# Allegro board Wireless Ember with FEM V1.0.brd
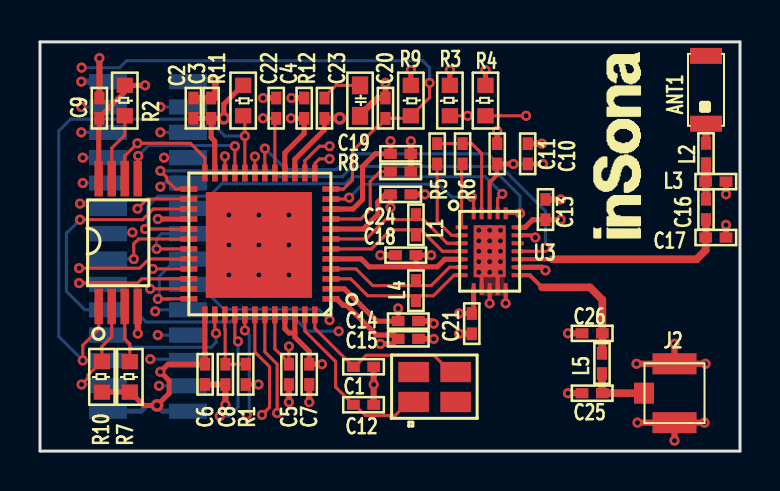
[diagram p0: board, top side]
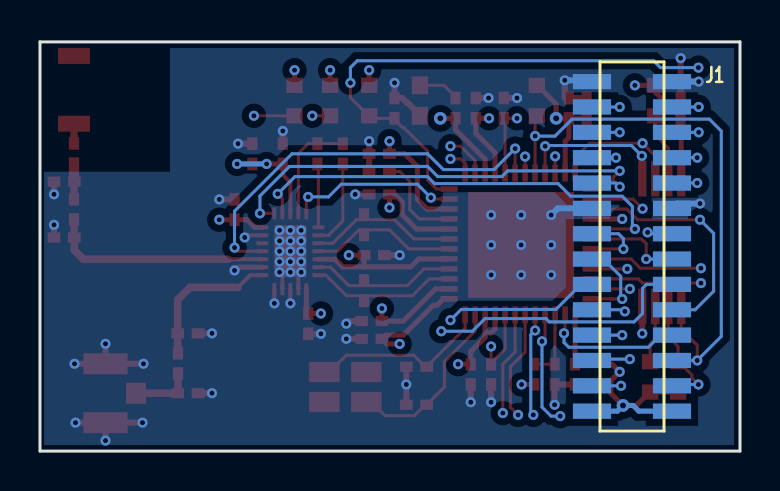
[diagram p1: board, bottom side, seen from below]

Outline 35 x 20.5 mm; copper layers: TOP, GND, PWR, BOTTOM. Coordinates in mm from the lower left corner of the outline.
Outline path: 0,20.5 0,0 35,0 35,20.5 0,20.5

## Design rules (mm)
nets with their own width: min track width 0.254; nets +1.8V +3.3V
nets with their own width: min track width 0.305; nets GND

## Placement (name value [footprint] x y rotation side)
ANT1  2450AT18B100  [AT18B100]  33.3 16.4 90 top
C1  18pF-SC0402  [SC0402]  15.67 4.23 0 top
C2  100nF-SC0402  [SC0402]  7.67 16.67 90 top
C3  0.1uF-SC0402  [SC0402]  8.56 16.67 90 top
C4  0.1uF-SC0402  [SC0402]  13.21 16.67 90 top
C5  10nF-SC0402  [SC0402]  12.45 4.35 270 top
C6  0.1uF-SC0402  [SC0402]  8.26 4.35 270 top
C7  8pF-SC0402  [SC0402]  13.46 4.35 270 top
C8  0.47uF-SC0402  [SC0402]  9.27 4.35 270 top
C9  100nF-SC0402  [SC0402]  2.97 16.67 90 top
C10  100nF-SC0402  [SC0402]  24.38 14.39 90 top
C11  10pF-SC0402  [SC0402]  22.86 14.39 90 top
C12  18pF-SC0402  [SC0402]  15.67 2.32 0 top
C13  10pF-SC0402  [SC0402]  25.27 11.59 90 top
C14  10nF-SC0402  [SC0402]  18.92 6.51 180 top
C15  10nF-SC0402  [SC0402]  18.92 5.62 180 top
C16  NC  [SC0402]  33.3 11.6 90 top
C17  NC  [SC0402]  34.3 10.7 180 top
C18  8pF-SC0402  [SC0402]  17.78 9.81 0 top
C19  10nF-SC0402  [SC0402]  18.54 14.89 180 top
C20  10nF-SC0402  [SC0402]  17.27 17.69 270 top
C21  8pF-SC0402  [SC0402]  21.59 5.88 90 top
C22  1uF-SC0402  [SC0402]  11.81 16.67 90 top
C23  2.2uF-SC0603  [SC0603]  16 17.56 270 top
C24  10nF-SC0402  [SC0402]  18.54 12.86 180 top
C25  1pF-SC0402  [SC0402]  27.1 2.9 0 top
C26  1pF-SC0402  [SC0402]  27.1 5.9 0 top
J1  J14x2  [CON2X14_127]  3.4 2 90 bottom
J2  108-112005  [UMCC-3]  30.2 2.9 270 top
L1  3.3nH-SL0402  [L0402]  18.8 10.83 90 top
L2  2.0nH-SL0402  [L0402]  33.3 14.4 90 top
L3  1.5nH-SL0402  [L0402]  34.3 13.5 180 top
L4  3.0nH-SL0402  [L0402]  18.8 7.53 90 top
L5  2.7nH-SL0402  [L0402]  28.1 4.9 270 top
R1  10R-SR0402  [SR0402]  10.29 3.34 90 top
R2  4K7-SR0603  [SR0603]  4.24 17.56 90 top
R3  4K7-SR0603  [SR0603]  20.5 17.56 90 top
R4  4K7-SR0603  [SR0603]  22.27 17.56 90 top
R5  1K2-SR0402  [SR0402]  19.86 14.39 90 top
R6  1K2-SR0402  [SR0402]  21.13 14.39 90 top
R7  4K7-SR0603  [SR0603]  4.49 3.72 90 top
R8  180K-SR0402  [SR0402]  18.54 14.01 180 top
R9  4K7-SR0603  [SR0603]  18.54 17.56 270 top
R10  4K7-SR0603  [SR0603]  3.1 3.72 90 top
R11  4K7-SR0603  [SR0603]  10.16 17.56 270 top
R12  1R-SR0402  [SR0402]  14.22 17.69 270 top
U1  CAT25512  [TSSOP8-26-173]  3.91 10.45 90 top
U2  ST32W108CC  [QFN48-20-284]  14.49 13.88 180 top
U3  -  [SE2432L]  21.08 11.21 270 top
Y1  xtal-24M  [XTAL-128-100]  19.73 3.21 90 top

## Library data of the parts
ANT1 = ANTENNA_1
C1-C26 = CAP NP
J1 = J14*2
J2 = 108-112005
L1-L5 = INDUCTOR
R1-R12 = R
U1 = CAT25512
U2 = ST32W108CC_1
U3 = SE2432L
Y1 = xtal-32M

## Footprints (pads in the part's own frame, mm; a bottom-side part is the same pattern mirrored in y, then rotated)
AT18B100
  rect 0.8x1.6 smd: 1(0,0) 2(3.4,0)
CON2X14_127
  rect 0.762x1.905 smd: 1(0,0) 2(0,4) 3(1.27,0) 4(1.27,4) 5(2.54,0) 6(2.54,4) 7(3.81,0) 8(3.81,4) 9(5.08,0) 10(5.08,4) 11(6.35,0) 12(6.35,4) 13(7.62,0) 14(7.62,4) 15(8.89,0) 16(8.89,4) 17(10.16,0) 18(10.16,4) 19(11.43,0) 20(11.43,4) 21(12.7,0) 22(12.7,4) 23(13.97,0) 24(13.97,4) 25(15.24,0) 26(15.24,4) 27(16.51,0) 28(16.51,4)
L0402
  rect 0.635x0.508 smd: 1(0,0) 2(1.016,0)
QFN48-20-284
  rect 0.85x0.28 smd: 1(-0.05,6.25) 2(-0.05,5.75) 3(-0.05,5.25) 4(-0.05,4.75) 5(-0.05,4.25) 6(-0.05,3.75) 7(-0.05,3.25) 8(-0.05,2.75) 9(-0.05,2.25) 10(-0.05,1.75) 11(-0.05,1.25) 12(-0.05,0.75) 25(7.05,0.75) 26(7.05,1.25) 27(7.05,1.75) 28(7.05,2.25) 29(7.05,2.75) 30(7.05,3.25) 31(7.05,3.75) 32(7.05,4.25) 33(7.05,4.75) 34(7.05,5.25) 35(7.05,5.75) 36(7.05,6.25)
  rect 0.28x0.85 smd: 13(0.75,-0.05) 14(1.25,-0.05) 15(1.75,-0.05) 16(2.25,-0.05) 17(2.75,-0.05) 18(3.25,-0.05) 19(3.75,-0.05) 20(4.25,-0.05) 21(4.75,-0.05) 22(5.25,-0.05) 23(5.75,-0.05) 24(6.25,-0.05) 37(6.25,7.05) 38(5.75,7.05) 39(5.25,7.05) 40(4.75,7.05) 41(4.25,7.05) 42(3.75,7.05) 43(3.25,7.05) 44(2.75,7.05) 45(2.25,7.05) 46(1.75,7.05) 47(1.25,7.05) 48(0.75,7.05)
  rect 5.3x5.3 smd: 49(3.55,3.55)
SC0402
  rect 0.635x0.508 smd: 1(0,0) 2(1.016,0)
SC0603
  rect 0.889x0.813 smd: 1(-0.762,0) 2(0.762,0)
SE2432L
  rect 0.2x0.6 smd: 1(0,0) 2(0.4,0) 3(0.8,0) 4(1.2,0) 5(1.6,0) 6(2,0) 7(2.4,0) 13(2.4,2.8) 14(2,2.8) 15(1.6,2.8) 16(1.2,2.8) 17(0.8,2.8) 18(0.4,2.8) 19(0,2.8)
  rect 0.6x0.2 smd: 8(3.1,0.6) 9(3.1,1) 10(3.1,1.4) 11(3.1,1.8) 12(3.1,2.2) 20(-0.7,2.2) 21(-0.7,1.8) 22(-0.7,1.4) 23(-0.7,1) 24(-0.7,0.6)
  rect 2.6x1.6 smd: 25(1.2,1.4)
SR0402
  rect 0.635x0.508 smd: 1(0,0) 2(1.016,0)
SR0603
  rect 0.762x0.813 smd: 1(-0.762,0) 2(0.762,0)
TSSOP8-26-173
  rect 1.78x0.42 smd: 1(-3.2,0.975) 2(-3.2,0.325) 3(-3.2,-0.325) 4(-3.2,-0.975) 5(3.2,-0.975) 6(3.2,-0.325) 7(3.2,0.325) 8(3.2,0.975)
UMCC-3
  rect 1.05x1 smd: 1(0,0)
  rect 1.05x2.2 smd: 2(-1.475,1.525) 3(1.475,1.525)
XTAL-128-100
  rect 1.016x1.524 smd: 1(-0.75,1.05) 2(-0.75,-1.05) 3(0.75,-1.05) 4(0.75,1.05)

## Nets
+1.2V: C5.1 C22.1 U2.17(VDD_CORE1) U2.44(VDD_CORE2)
+1.8V: C7.1 C14.2 C15.2 C18.2 C19.2 C21.2 C24.2 R1.1 R12.2 U2.1(VDD_24M) U2.2(VDD_VCO) U2.5(VDD_RF) U2.8(VDD_IF) U2.10(VDD_PADSA) U2.15(VREG_OUT) U2.45(VDD_PRE) U2.46(VDD_SYNTH) U3.5(VB_OUT) U3.8(VB_IN)
+3.3V: C2.1 C3.1 C4.1 C6.1 C9.1 C10.1 C11.1 C13.1 J1.1 J1.2 R2.2 R3.2 R4.2 R7.1 R9.1 R10.1 R11.1 U1.8(VCC) U2.16(VDD_PADS1) U2.23(VDD_PADS2) U2.28(VDD_PADS3) U2.37(VDD_PADS4) U3.19(VCC2) U3.22(VCC1)
GND: C1.2 C2.2 C3.2 C4.2 C5.2 C6.2 C7.2 C8.2 C9.2 C10.2 C11.2 C12.2 C13.2 C14.1 C15.1 C17.1 C18.1 C19.1 C20.1 C21.1 C22.2 C23.2 C24.1 C25.1 C26.1 J1.17 J1.18 J1.27 J1.28 J2.2(G1) J2.3(G2) L3.1 R8.1 U1.4(VSS) U2.49(EPAD) U3.9(GND1) U3.10(GND2) U3.11(GND3) U3.12(GND4) U3.14(GND5) U3.18(GND6) U3.25(PAD)
VDD_MEM: C8.1 R1.2 U2.39(VDD_MEM)
ANT1: C16.1 C17.2 U3.15(ANT1)
ANT2: C26.2 L5.1 U3.13(ANT2)
BOUT: R5.2 R6.2 U3.23(BOUT)
CLK: J1.4 U1.6(SCK) U2.24(PA2)
JTCK: J1.19 U2.32(JTCK)
JTMS: J1.22 U2.35(PC4/JTMS)
MISO: J1.3 R10.2 U1.2(SO) U2.22(PA1)
MOSI: J1.6 U1.5(SI) U2.21(PA0)
NRST: C20.2 J1.15 R9.2 U2.12(NRST)
PA3: R4.1 U2.25(PA3) U3.20(CSD)
PA4: J1.10 U2.26(PA4)
PA5: J1.9 U2.27(PA5)
PA6: R3.1 U2.29(PA6) U3.21(CPS)
PA7: U2.18(PA7/REG_EN) U3.16(ANT_SEL)
PB0: J1.14 U2.36(PB0)
PB3: J1.8 U2.19(PB3)
PB4: J1.5 R11.2 U1.1(/CS) U2.20(PB4)
PB5: J1.26 U2.43(PB5)
PB6: J1.25 U2.42(PB6)
PB7: J1.24 U2.41(PB7)
PC0: J1.23 U2.40(PC0)
PC1: J1.7 U2.38(PC1)
PC2: J1.20 U2.33(PC2/JTDO)
PC3: J1.21 U2.34(PC3/JTDI)
PC5: U2.11(PC5) U3.24(CTX)
PC6: J1.12 U2.13(PC6)
PC7: J1.11 U2.14(PC7)
RF_N: L4.2 U2.4(RF_N) U3.6(RXP)
RF_P: L4.1 U2.3(RF_P) U3.7(RXN)
RF_TX_ALT_N: L1.2 U2.7(RF_TX_ALT_N) U3.3(TXP)
RF_TX_ALT_P: L1.1 U2.6(RF_TC_ALT_P) U3.4(TXN)
RXD: J1.16 U2.31(PB2)
TXD: J1.13 U2.30(PB1)
X1: C12.1 U2.47(OSC_IN) Y1.1
X2: C1.1 U2.48(OSC_OUT) Y1.3
N463813: R2.1 U1.7(/HOLD)
N464721: C23.1 R12.1
N465331: R8.2 U2.9(BIAS_R)
N472504: R6.1 U3.1(B2)
N472511: R5.1 U3.2(B1)
N474104: C16.2 L2.1 L3.2
N474119: ANT1.1(FEED) L2.2
N474333: C25.2 J2.1(SIG) L5.2
N485407: R7.2 U1.3(/WP)

Pads without a net: ANT1 2; U3 17; Y1 2 4

## Via types
v1: diameter 0.508, hole 0.254, TOP to BOTTOM, 117 vias
v2: diameter 0.635, hole 0.305, TOP to BOTTOM, 3 vias
v3: diameter 0.5, hole 0.25, TOP to BOTTOM, 15 vias

## Routing (per net, layer and track width the routed paths; a pad name or vN(x,y) marks a point on that pad's centre or on a via; arc(x,y) is an arc through that point)
+1.2V: length 28.6
  TOP w0.152: v1(11.15,16.67) C22.1 11.74,16.61 U2.17 ; 12.45,4.42 v1(12.45,5.24) ; 12.45,4.42 C5.1 ; 12.45,4.42 11.74,5.12 U2.44
  PWR w0.254: v1(12.45,5.24) 12.45,3.59 11.68,2.83 8.76,2.83 8.05,3.54 8.05,14.51 10.21,16.67 v1(11.15,16.67)
+1.8V: length 135.3
  TOP w0.254: 18.8,9.23 16.46,9.23 16.06,9.63 U2.5 ; 18.8,9.23 C18.2 v1(19.56,9.81) ; 18.8,9.23 19.86,9.23 20.24,9.61 U3.5 ; U2.45 12.24,6.12 12.45,5.92 12.74,5.92 ; U2.15 12.74,14.62 14.22,16.1 R12.2 v2(14.99,16.67) ; v1(17.53,12.2) C24.2 17.27,12.86 16.89,12.48 16.89,11.85 16.17,11.13 U2.8 ; 12.74,5.92 12.74,5.71 13.46,4.99 C7.1 v1(14.1,4.35) ; 12.74,5.92 U2.46 ; R1.1 v1(10.92,3.34) ; U2.10 15.65,12.13 16.13,12.61 16.13,14.26 16.76,14.89 C19.2 v1(17.53,15.53) ; U2.1 14.83,7.63 15.15,7.31 15.33,7.31 16.83,5.81 17.72,5.81 17.91,5.62 17.65,5.37 v1(17.02,5.37) ; v1(17.91,7.15) 17.91,6.51 16.84,6.51 15.22,8.13 U2.2 ; U3.8 21.68,6.99 C21.2 v1(20.95,6.89)
  PWR w0.254: v1(10.92,3.34) 10.03,3.34 9.31,4.06 9.31,6.59 8.64,7.26 8.64,12.81 9.32,13.5 11.35,13.5 12.24,14.39 12.24,15.44 13.47,16.67 v2(14.99,16.67) ; v1(17.53,12.2) 17.89,11.84 18.54,11.19 18.54,7.78 19.43,6.89 v1(20.95,6.89) 20.95,16.34 19.35,17.94 15.37,17.94 14.99,17.56 v2(14.99,16.67) ; v2(14.99,16.67) 16.38,16.67 v1(17.53,15.53) ; v2(14.99,16.67) 16.64,15.02 16.64,11.97 17.91,10.7 v1(17.91,7.15) ; v2(14.99,16.67) 13.59,15.28 13.59,6.13 14.1,5.62 v1(14.1,4.35) ; v2(14.99,16.67) 15.49,17.18 19.05,17.18 19.94,16.29 19.94,11.72 19.56,11.34 v1(19.56,9.81) ; v2(14.99,16.67) 14.99,15.58 16.13,14.43 16.13,6.26 v1(17.02,5.37)
+3.3V: length 94.2
  TOP w0.2: C11.1 22.86,13.84 22.48,13.46 U3.22
  TOP w0.254: U1.8 2.94,16.07 2.97,16.1 C9.1 2.97,16.72 4.21,17.97 4.21,18.3 R2.2 v1(5.25,18.32) ; v1(26.04,11.59) C13.1 24.64,11.59 24.26,11.21 U3.19 ; U2.28 v1(5.89,11.63) ; R3.2 v1(20.5,19.09) ; U2.37 8.24,4.94 8.26,4.92 C6.1 6.4,4.35 v1(6.02,3.97) 6.46,3.53 6.46,2.89 v2(5.85,2.29) 5.19,2.29 4.52,2.96 R7.1 R10.1 ; R9.1 v1(18.54,19.09) ; C10.1 v1(25.15,14.39) ; R4.2 v1(22.27,19.09) ; C3.1 8.56,15.71 8.74,15.53 8.74,13.94 U2.23 ; C3.1 v2(9.19,16.67) 9.19,17.38 10.13,18.32 R11.1 ; C3.1 C2.1 ; C11.1 v1(23.67,14.39) ; v1(12.55,16.67) C4.1 13.21,15.91 12.24,14.95 U2.16
  PWR w0.254: v1(5.25,18.32) 7.54,18.32 v2(9.19,16.67) ; v2(9.19,16.67) 7.79,16.67 6.53,15.4 5.89,15.4 5.42,14.93 5.42,12.61 5.89,12.14 v1(5.89,11.63) ; v2(9.19,16.67) 9.7,17.18 12.04,17.18 v1(12.55,16.67) 14.96,19.09 v1(18.54,19.09) v1(20.5,19.09) v1(22.27,19.09) 23.67,17.69 v1(23.67,14.39) ; v1(25.15,14.39) 25.15,12.48 v1(26.04,11.59)
  PWR w0.381: v2(9.19,16.67) 7.29,14.77 7.29,3.15 6.83,2.69 6.25,2.69 v2(5.85,2.29)
  BOTTOM w0.254: v1(23.67,14.39) v1(25.15,14.39) ; J1.2 6.14,2 v2(5.85,2.29) 5.34,2.29 5.06,2 J1.1
GND: length 47.8
  TOP w0.2: U3.11 22.88,9.61 v3(22.48,10.01) 22.08,9.61 U3.9 ; U3.10 v1(22.48,7.4) ; v1(24.77,10.7) 24.66,10.81 U3.18 ; U3.12 v1(23.28,7.4)
  TOP w0.254: U3.14 25.11,9.21 v1(25.27,9.05)
  TOP w0.305: C6.2 C8.2 v1(9.27,2.32) ; R8.1 C19.1 v1(18.54,15.53) ; C2.2 C3.2 8.76,17.69 v1(8.76,18.58) ; v1(17.27,18.45) C20.1 16.89,17.69 16.64,17.44 16.61,17.44 16,16.84 C23.2 ; C22.2 v1(11.15,17.69) ; C15.1 v1(19.68,5.62) ; J2.3 v1(29.88,1.43) ; J2.3 v1(31.73,0.53) ; J2.3 v1(33.23,1.43) ; J2.2 v1(31.73,5.38) ; J2.2 v1(29.82,4.38) ; J2.2 v1(33.27,4.38) ; C13.2 v1(26.04,12.61) ; C26.1 v1(26.4,5.9) ; C14.1 19.56,6.51 v1(19.68,6.38) ; U1.4 v1(4.89,5.89) ; C5.2 v1(12.45,2.45) ; C9.2 v1(2.97,19.68) ; 16.68,4.23 v1(16.68,3.34) 16.68,2.32 ; C24.1 v1(19.24,12.86) ; C7.2 v1(13.46,2.45) ; C21.1 v1(20.95,5.88) ; C11.2 v1(22.86,16.04) ; C10.2 v1(25.1,15.4) ; C17.1 v1(34.3,11.34) ; L3.1 v1(34.3,12.87) ; C25.1 v1(26.4,2.9) ; C4.2 v1(12.57,17.69) ; C18.1 v1(17.02,9.81)
  BOTTOM w0.305: v1(9.44,11.83) 9.11,12.16 J1.18 ; v1(8.76,18.58) 7.47,18.58 J1.28 ; J1.27 v1(2.07,18.51) ; J1.17 3.16,12.4 v1(2,12.4)
  vias: v1(9.44,10.33) v1(9.44,8.83) v1(10.94,11.83) v1(10.94,10.33) v1(10.94,8.83) v1(12.44,11.83) v1(12.44,10.33) v1(12.44,8.83) v3(21.94,11.06) v3(21.94,10.53) v3(21.94,10.01) v3(21.94,9.49) v3(21.94,8.96) v3(22.48,11.06) v3(22.48,10.53) v3(22.48,9.49) v3(22.48,8.96) v3(23.02,11.06) v3(23.02,10.53) v3(23.02,10.01) v3(23.02,9.49) v3(23.02,8.96)
VDD_MEM: length 3.5
  TOP w0.152: R1.2 C8.1 9.26,4.37 9.26,6.09 9.24,6.1 U2.39
ANT1: length 11.1
  TOP w0.203: U3.15 25.6,9.61
  TOP w0.381: 25.6,9.61 32.83,9.61 33.28,10.06 C17.2 33.3,10.72 C16.1
ANT2: length 7.4
  TOP w0.203: 25.1,8.2 24.49,8.81 U3.13
  TOP w0.381: L5.1 28.12,4.92 C26.2 28.12,7.58 27.5,8.2 25.1,8.2
BOUT: length 5.4
  TOP w0.152: R5.2 R6.2 21.59,15.4 22.08,14.91 22.08,12.48 U3.23
CLK: length 23.2
  TOP w0.152: U1.6 4.24,14.79 v1(4.87,15.42) 7.52,15.42 8.24,14.7 U2.24
  PWR w0.152: v1(5.95,3.27) 4.18,3.27 3.48,3.97 3.48,14.77 4.13,15.42 v1(4.87,15.42)
  BOTTOM w0.152: J1.4 v1(5.95,3.27)
JTCK: length 11.8
  TOP w0.152: U2.32 5.45,9.63 4.98,9.16 v1(1.95,9.16)
  PWR w0.152: v1(2.14,13.43) 2.71,12.86 2.71,9.92 v1(1.95,9.16)
  BOTTOM w0.152: J1.19 v1(2.14,13.43)
JTMS: length 10.8
  TOP w0.152: U2.35 v1(5.51,8.13)
  PWR w0.152: v1(5.51,8.13) 6.11,8.13 6.78,8.8 6.78,14.12 v1(6.2,14.7)
  BOTTOM w0.152: J1.22 v1(6.2,14.7)
MISO: length 23
  TOP w0.152: U2.22 v1(9.24,14.77) ; U1.2 3.59,5.73 3.1,5.24 R10.2 3.07,4.48 2.4,3.81 2.4,3.66 v1(2.08,3.34)
  GND w0.152: v1(9.24,14.77) 7.79,14.77 6.78,13.75 6.78,7.27 5.89,6.38 4.24,6.38 3.6,5.75 3.6,4.86 v1(2.08,3.34)
  BOTTOM w0.152: J1.3 3.33,3.34 v1(2.08,3.34)
MOSI: length 21.9
  TOP w0.152: U2.21 v1(9.74,15.28) ; U1.5 4.89,14.64 4.91,14.66 v1(4.91,14.79)
  PWR w0.152: v1(5.51,4.61) 4.37,4.61 3.86,5.12 3.86,14.51 4.13,14.79 v1(4.91,14.79)
  BOTTOM w0.152: v1(9.74,15.28) 9.71,15.31 5.43,15.31 v1(4.91,14.79) ; v1(5.51,4.61) 7.33,4.61 J1.6
NRST: length 39.8
  TOP w0.152: U2.12 15.17,13.13 15.62,13.58 15.62,15.02 16.81,16.21 16.87,16.21 17.27,16.61 C20.2 18.41,16.67 R9.2 18.57,16.8 19.48,17.71 v1(19.48,18.45)
  GND w0.152: v1(2.08,19.21) 1.19,18.32 1.19,11.72 1.95,10.96 v1(4.62,10.96)
  BOTTOM w0.152: J1.15 4.55,10.89 v1(4.62,10.96) ; v1(2.08,19.21) 3.98,19.21 4.33,19.56 19.13,19.56 19.48,19.21 v1(19.48,18.45)
PA3: length 29.5
  TOP w0.152: v1(6.02,14.04) 6.34,13.72 6.34,13.57 6.78,13.13 U2.25 ; U3.20 v1(24,11.91) ; R4.1 v1(24.3,16.8)
  PWR w0.152: v1(24,11.91) 24,12.37 24.3,12.67 v1(24.3,16.8)
  BOTTOM w0.152: v1(6.02,14.04) 11.62,14.04 11.91,13.75 15.11,13.75 15.62,14.26 22.53,14.26 24,12.78 v1(24,11.91)
PA4: length 11.2
  TOP w0.152: v1(4.87,12.14) 5.36,12.63 U2.26
  PWR w0.152: v1(5.76,7) 4.64,7 4.16,7.48 4.16,11.43 v1(4.87,12.14)
  BOTTOM w0.152: v1(5.76,7) 5.76,7 5.84,7.08 J1.10
PA5: length 12
  TOP w0.152: U2.27 5.66,12.13 5.13,11.59 v1(2,11.59)
  BOTTOM w0.152: J1.9 2.24,7.08 1.32,8.01 1.32,10.91 v1(2,11.59)
PA6: length 28.7
  TOP w0.152: U3.21 22.88,12.66 v1(23.11,12.89) ; v1(5.25,11.13) U2.29 ; R3.1 v1(21.38,16.8)
  PWR w0.152: v1(23.11,12.89) 22.02,13.98 22.02,16.16 v1(21.38,16.8)
  BOTTOM w0.152: v1(5.25,11.13) 5.38,11.26 5.38,12.26 5.89,12.77 8.46,12.77 9.1,13.4 15.27,13.4 15.62,13.75 22.25,13.75 v1(23.11,12.89)
PA7: length 20.5
  TOP w0.152: U3.16 25.09,10.01 v1(25.27,10.2) ; U2.18 v1(11.24,15.16)
  BOTTOM w0.152: v1(11.24,15.16) 12.3,14.1 14.83,14.1 15.62,14.89 22.4,14.89 25.27,12.02 v1(25.27,10.2)
PB0: length 4.5
  TOP w0.152: v1(5.89,7.62) 6.35,7.62 6.35,7.62 6.48,7.62 6.48,7.63 U2.36
  BOTTOM w0.152: J1.14 6.83,9.62 5.97,8.76 5.97,7.7 v1(5.89,7.62)
PB3: length 14.7
  TOP w0.152: U2.19 v1(10.74,14.76)
  GND w0.152: v1(10.74,14.76) 10.25,14.26 7.79,14.26 7.16,13.62 7.16,7.08 v1(5.89,5.81)
  BOTTOM w0.152: J1.8 v1(5.89,5.81)
PB4: length 29.1
  TOP w0.152: v1(2.14,4.54) 2.14,5.3 2.94,6.1 U1.1 ; U2.20 v1(10.24,15.78) 10.24,16.71 R11.2
  BOTTOM w0.152: J1.5 v1(2.14,4.54) 0.94,5.74 0.94,16.04 1.53,16.63 8.4,16.63 9.24,15.78 v1(10.24,15.78)
PB5: length 39.5
  TOP w0.152: v1(11.86,1.91) 11.86,4.35 11.24,4.97 U2.43
  PWR w0.152: v1(11.86,1.91) 11.86,1.44 11.06,0.64 2.5,0.64 0.56,2.58 0.56,16.42 1.84,17.7 3.98,17.7 4.43,17.24 v1(6.02,17.24)
  BOTTOM w0.152: J1.26 v1(6.02,17.24)
PB6: length 33.1
  TOP w0.152: v1(11.1,1.81) 11.48,2.19 11.48,4.23 10.74,4.96 U2.42
  PWR w0.152: v1(2.07,17.24) 0.86,16.03 0.86,2.78 2.7,0.94 10.22,0.94 v1(11.1,1.81)
  BOTTOM w0.152: J1.25 v1(2.07,17.24)
PB7: length 34.7
  TOP w0.152: U2.41 v1(10.24,6.04)
  PWR w0.152: v1(10.34,1.81) 9.79,1.27 2.88,1.27 1.19,2.96 1.19,15.78 1.84,16.43 3.15,16.43 3.6,15.97 v1(6.02,15.97)
  BOTTOM w0.152: v1(10.24,6.04) 10.46,5.83 10.46,1.94 v1(10.34,1.81) ; J1.24 v1(6.02,15.97)
PC0: length 28.2
  TOP w0.152: v1(9.9,5.5) 9.9,5.5 9.74,5.66 U2.40
  PWR w0.152: v1(8.99,1.75) 2.9,1.75 1.5,3.16 1.5,15.4 v1(2.07,15.97)
  BOTTOM w0.152: v1(8.99,1.75) 9.45,1.75 9.9,2.21 v1(9.9,5.5) ; J1.23 v1(2.07,15.97)
PC1: length 7.2
  TOP w0.152: U2.38 8.74,5.96 v1(8.8,5.9)
  BOTTOM w0.152: v1(8.8,5.9) 8.8,5.44 8.56,5.2 4.58,5.2 3.97,5.81 J1.7
PC2: length 8.1
  TOP w0.152: U2.33 v1(5.64,9.13)
  PWR w0.152: v1(6.02,13.24) 6.02,12.79 6.4,12.4 6.4,9.43 6.09,9.13 v1(5.64,9.13)
  BOTTOM w0.152: v1(6.02,13.24) 6.2,13.43 J1.20
PC3: length 14
  TOP w0.152: U2.34 5.08,8.63 4.87,8.42 v1(1.95,8.42)
  PWR w0.152: v1(2.14,14.7) 3.1,13.74 3.1,9.56 v1(1.95,8.42)
  BOTTOM w0.152: J1.21 v1(2.14,14.7)
PC5: length 8.5
  TOP w0.152: U2.11 15.39,12.63 v1(15.46,12.7) ; U3.24 21.68,12.64 v1(21.59,12.73)
  BOTTOM w0.152: v1(21.59,12.73) 20.57,12.73 19.94,13.37 16.13,13.37 v1(15.46,12.7)
PC6: length 17.2
  TOP w0.152: U2.13 13.74,14.41 13.97,14.64 v1(14.48,14.64)
  PWR w0.152: v1(14.48,6.56) v1(14.48,14.64)
  BOTTOM w0.152: J1.12 7.95,8.35 9.2,7.1 13.94,7.1 v1(14.48,6.56)
PC7: length 25
  TOP w0.152: U2.14 13.24,14.55 13.97,15.27 v1(14.48,15.27)
  PWR w0.152: v1(14.48,15.27) 14.53,15.27 14.94,14.87 v1(14.94,6)
  BOTTOM w0.152: J1.11 4.68,8.35 4.87,8.15 4.87,6.89 5.3,6.47 9.53,6.47 9.7,6.64 12.75,6.64 13.38,6 v1(14.94,6)
RF_N: length 7.5
  TOP w0.152: 18.8,8.29 16.64,8.29 15.8,9.13 U2.4 ; 18.8,8.29 19.56,8.29 20.48,9.21 U3.6 ; 18.8,8.29 L4.2
RF_P: length 7.6
  TOP w0.152: U2.3 15.54,8.63 16.38,7.78 18.8,7.78 ; 18.8,7.78 L4.1 ; 18.8,7.78 19.67,7.78 20.7,8.81 U3.7
RF_TX_ALT_N: length 7.7
  TOP w0.152: U3.3 20.36,10.41 19.18,11.59 18.8,11.59 ; U2.7 16.31,10.63 17.27,11.59 18.8,11.59 ; 18.8,11.59 L1.2
RF_TX_ALT_P: length 7.6
  TOP w0.152: U2.6 16.57,10.13 17.53,11.08 18.8,11.08 ; 18.8,11.08 19.05,11.08 20.12,10.01 U3.4 ; 18.8,11.08 L1.1
RXD: length 3.8
  TOP w0.152: U2.31 v1(5.83,10.13)
  BOTTOM w0.152: J1.16 6.08,10.89 5.83,10.64 v1(5.83,10.13)
TXD: length 4.9
  TOP w0.152: U2.30 4.94,10.63 4.81,10.5 4.8,10.5 4.69,10.39 v1(4.69,9.62)
  BOTTOM w0.152: J1.13 v1(4.69,9.62)
X1: length 9
  TOP w0.152: U2.47 13.24,6.02 14.78,4.48 14.78,3.21 C12.1 15.73,2.32 16.28,1.78 17.75,1.78 18.43,2.46 Y1.1
X2: length 9.1
  TOP w0.152: U2.48 13.74,6.15 C1.1 15.73,4.23 16.31,4.8 19.69,4.8 20.53,3.96 Y1.3
N463813: length 3.4
  TOP w0.152: R2.1 4.24,15.83 3.59,15.18 U1.7
N464721: length 2.1
  TOP w0.152: R12.1 14.22,17.75 14.8,18.32 C23.1
N465331: length 4.8
  TOP w0.152: U2.9 16.04,11.63 16.51,12.1 16.51,13.51 17.01,14.01 R8.2
N472504: length 3.2
  TOP w0.152: R6.1 21.08,14.34 U3.1
N472511: length 4.4
  TOP w0.152: R5.1 19.86,11.53 20.58,10.81 U3.2
N474104: length 1.8
  TOP w0.381: L3.2 33.3,13.48 C16.2
  TOP w0.508: L2.1 33.3,13.52 L3.2
N474119: length 1
  TOP w0.381: L2.2 ANT1.1
N474333: length 3.1
  TOP w0.381: L5.2 28.1,2.92 C25.2 J2.1
N485407: length 2.9
  TOP w0.152: U1.3 4.24,5.62 4.49,5.37 R7.2

## Copper pours and planes (outline as drawn; the poured copper is in the pictures)
GND on TOP: 21.98,7.78 21.98,8.76 23.24,8.76 23.39,8.61 23.39,7.78
GND on BOTTOM: 0.3,0.3 0.3,20.2 28.5,20.2 28.5,14 34.8,14 34.8,0.3 ; 3 cut-outs
GND on GND: 0.3,0.3 0.3,20.2 28.5,20.2 28.5,14 34.8,14 34.8,0.3

## Text on the board
DEVICE_TYPE_TOP: FIGURE | SIZE | 0.25 | 0.254 | 0.3048 | DRILL CHART: TOP to BOTTOM | ALL UNITS ARE IN MILLIMETERS | PLATED | QTY | 15 | 117 | 3
